# EAGLE board board (EAGLE 9.3.2)
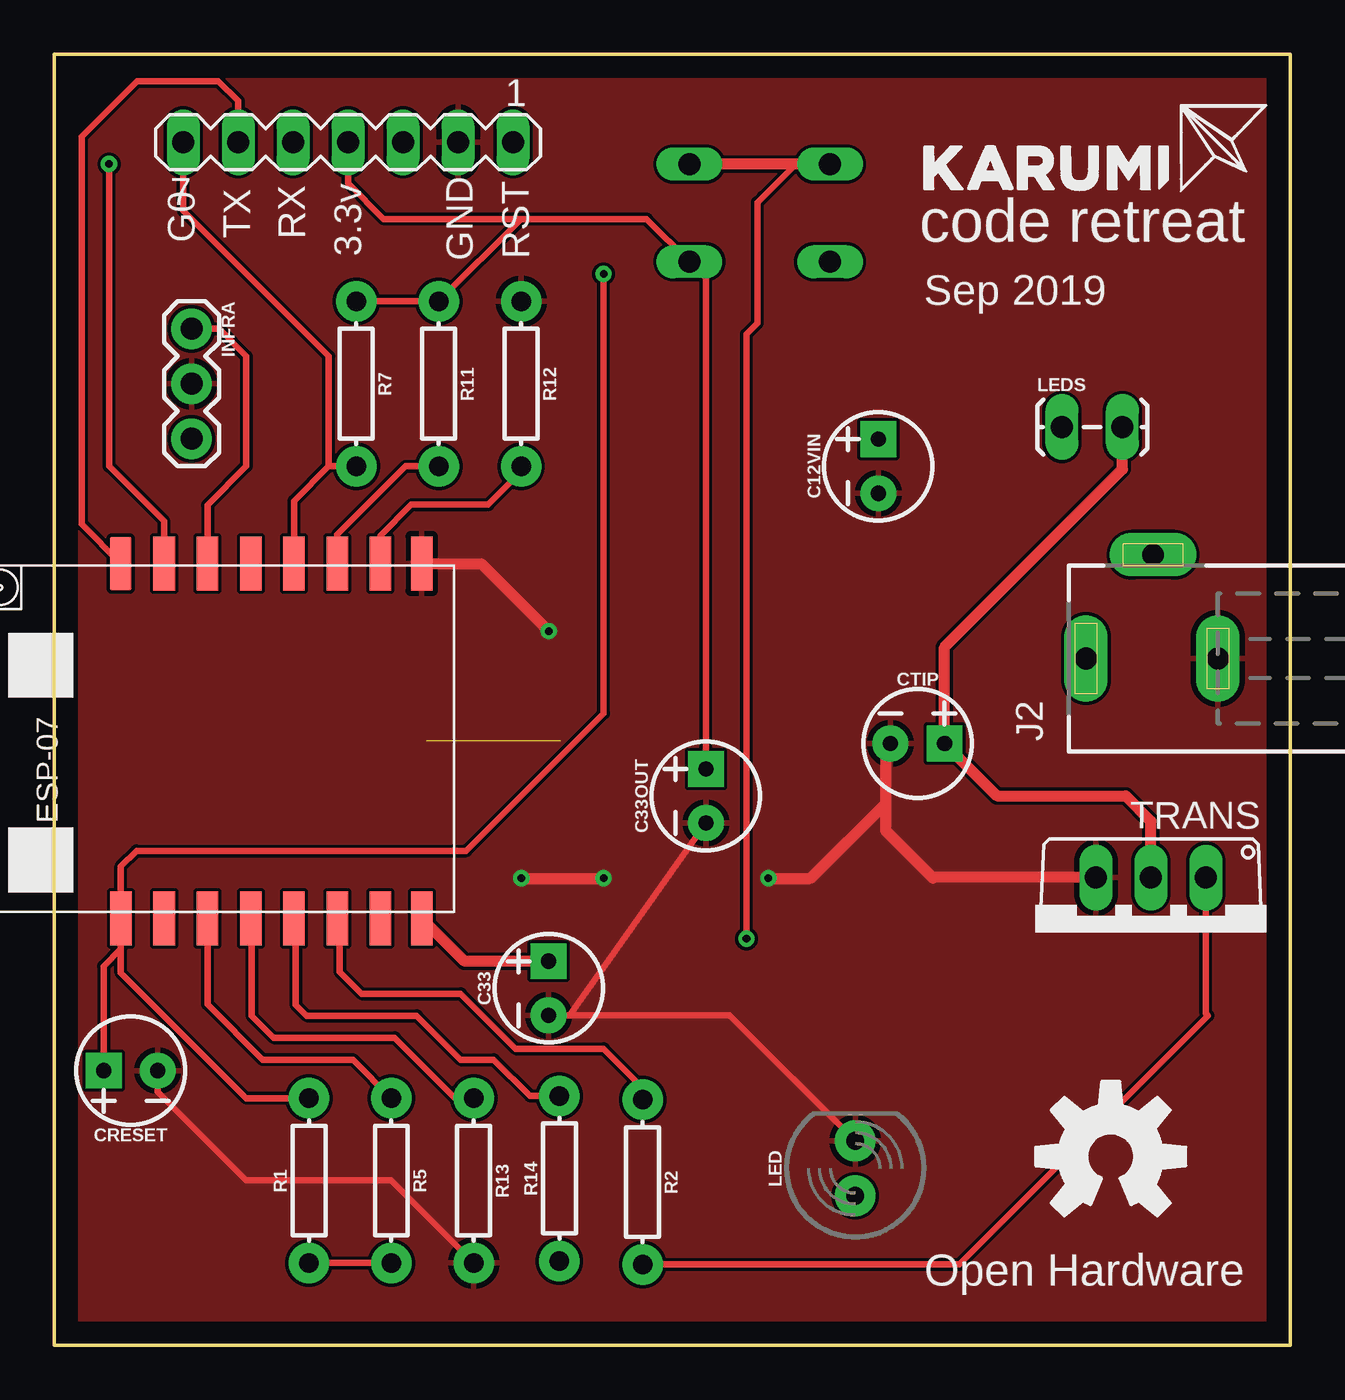
[diagram p0: board, top side]
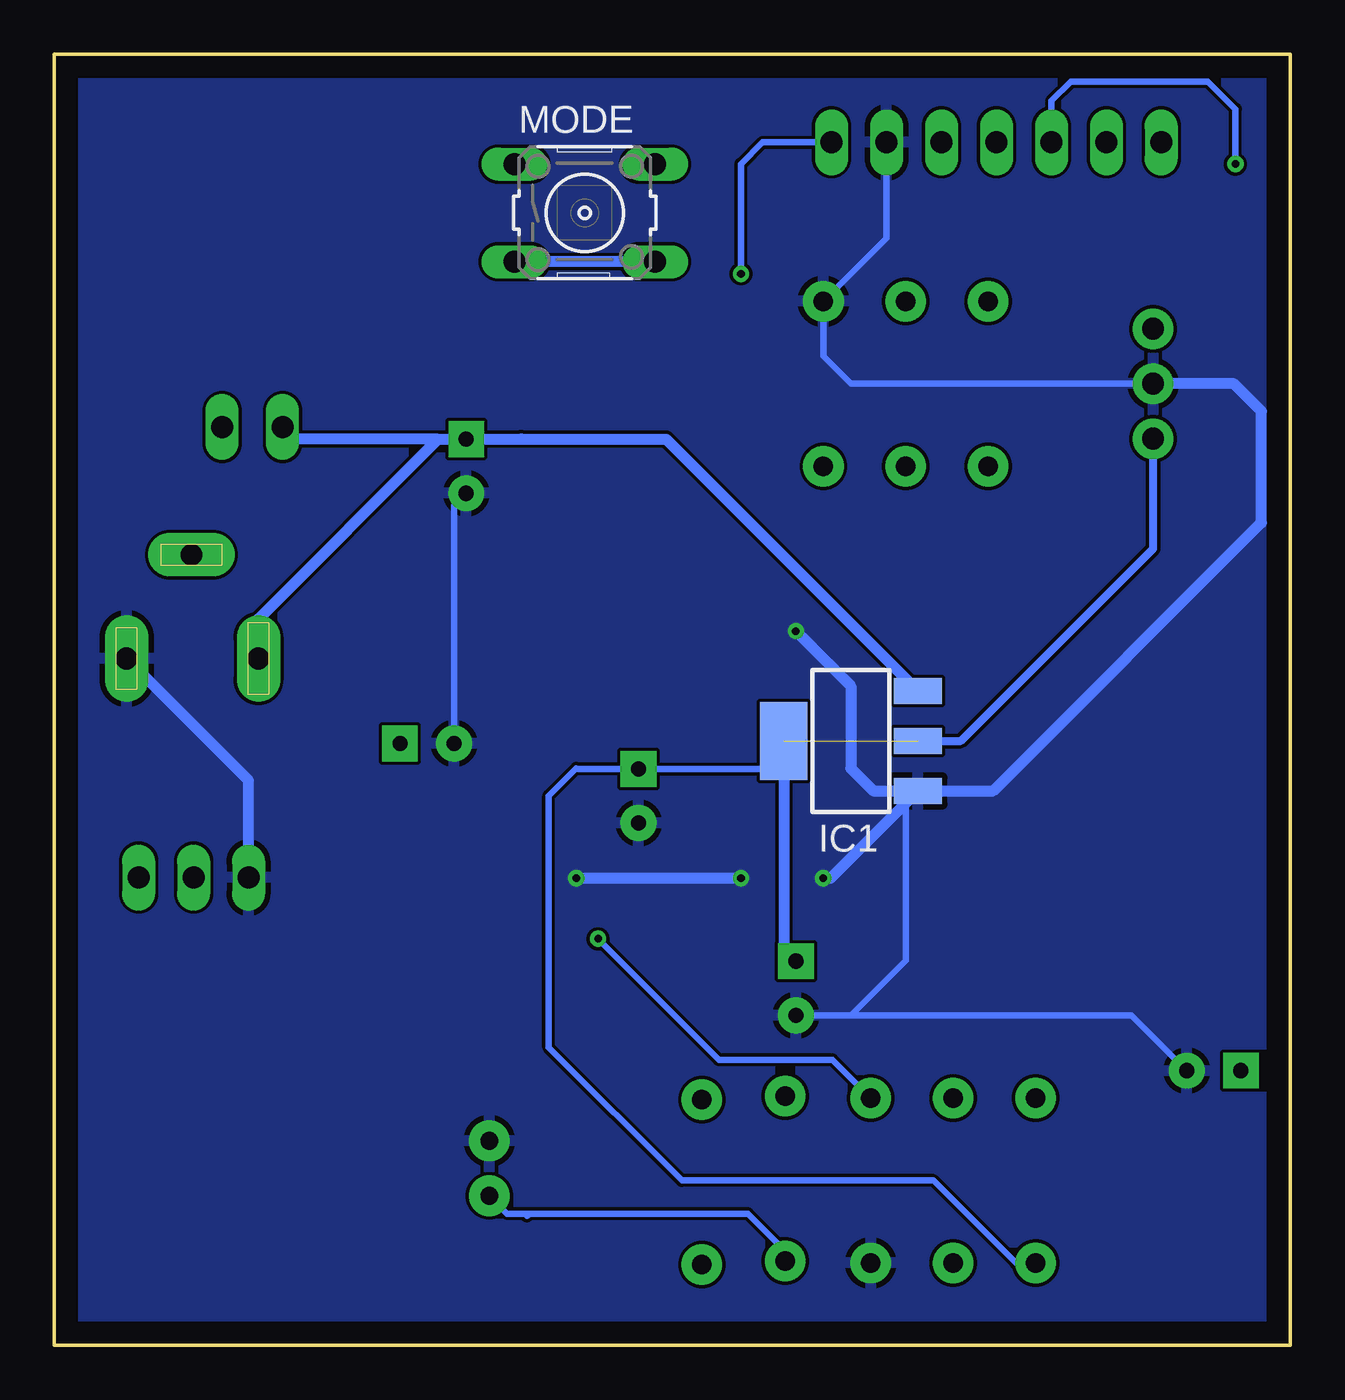
[diagram p1: board, bottom side, seen from below]

Size 57.15 x 59.69 mm. Coordinates in mm from the lower left corner, seen from the top.
Outline: 0,0 0,59.69 57.15,59.69 57.15,0 0,0
Copper layers (1*16): Top 0.035mm / dielectric 1.5mm / Bottom 0.035mm
Design rules "default": minimum track width 6mil, minimum drill 0.35mm, track to track 6mil, track to pad 6mil, pad to pad 6mil, via to via 6mil, smd to smd 6mil, copper to edge 40mil, drill to drill 6mil, minimum pad ring 10mil, minimum via ring 8mil, stop-mask expansion 4mil, vias tented up to drill 0mil, thermal gap 10mil

## Footprints (pad centres in the part's own frame; a part is rotated, then mirrored left to right if it is on the bottom)
CPOL-RADIAL-2.5MM-5MM-KIT = drill 0.7 pad 1.651 square: 1 1.25,0 | drill 0.7 pad 1.651: 2 -1.25,0
SOT223 = smd 1.219 x 2.235: 1 -2.311,-3.099; 2 0,-3.099; 3 2.311,-3.099 | smd 3.6 x 2.2: TAB 0,3.099
1X03 = drill 1.016 pad 1.88: 1 0,0; 2 2.54,0; 3 5.08,0
DCJ0202 = drill 1 pad 2 long: 1 0,3.1; 2 4.8,0; 3 0,-3
LED_5MM-KIT-NO-SILK = drill 0.813 pad 1.88: A -1.27,0; K 1.27,0
1X02_LOCK_LONGPADS = drill 1.016 long: 1 -0.127,0; 2 2.667,0
B3F-10XX = drill 1.016 long: 1 -3.251,2.261; 2 3.251,2.261; 3 -3.251,-2.261; 4 3.251,-2.261
AXIAL-0.3 = drill 0.9 pad 1.88: P$1 -3.81,0; P$2 3.81,0
MA07-1 = drill 1.016 long: 1 -7.62,0; 2 -5.08,0; 3 -2.54,0; 4 0,0; 5 2.54,0; 6 5.08,0; 7 7.62,0
TO220AV = drill 1.016 long: B -2.54,-2.54; C 0,-2.54; E 2.54,-2.54
ESP07-16PIN = smd 2.5 x 1: ADC -8.2,3.8; CH_PD -8.2,1.8; GND 8.2,-8.105; GPIO0 8.2,-2.2; GPIO2 8.2,-4.2; GPIO4 8.2,1.8; GPIO5 8.2,-0.2; GPIO12 -8.2,-4.2; GPIO13 -8.2,-6.2; GPIO14 -8.2,-2.2; GPIO15 8.2,-6.2; GPIO16 -8.2,-0.2; REST -8.2,5.8; RX 8.2,3.8; TX 8.2,5.8; VCC -8.2,-8.105

## Placement (x,y rotation side)
C12VIN  10uF  [CPOL-RADIAL-2.5MM-5MM-KIT]  38.1,40.64 90 top
C33  100uF  [CPOL-RADIAL-2.5MM-5MM-KIT]  22.86,16.51 90 top
C33OUT  10uF  [CPOL-RADIAL-2.5MM-5MM-KIT]  30.13,25.4 90 top
CRESET  100uF  [CPOL-RADIAL-2.5MM-5MM-KIT]  3.54,12.7 180 top
CTIP  10uF  [CPOL-RADIAL-2.5MM-5MM-KIT]  39.91,27.82 0 top
IC1  LM1117IMPX-3.3  [SOT223]  20.32,27.94 90 bottom
INFRA  455-1750-1-ND  [1X03]  6.35,46.99 270 top
J2  DCJ0202  [DCJ0202]  50.8,31.75 90 top
LED  [LED_5MM-KIT-NO-SILK]  37.03,8.19 90 top
LEDS  [1X02_LOCK_LONGPADS]  46.72,42.45 0 top
MODE  [B3F-10XX]  32.62,52.35 0 bottom
R1  10k  [AXIAL-0.3]  11.78,7.62 90 top
R2  470  [AXIAL-0.3]  27.21,7.55 270 top
R5  10k  [AXIAL-0.3]  15.59,7.62 270 top
R7  10k  [AXIAL-0.3]  13.97,44.45 270 top
R11  10k  [AXIAL-0.3]  17.78,44.45 270 top
R12  10k  [AXIAL-0.3]  21.59,44.45 270 top
R13  1K  [AXIAL-0.3]  19.4,7.62 270 top
R14  220  [AXIAL-0.3]  23.36,7.71 90 top
SV1  [MA07-1]  13.59,55.61 180 top
TRANS  TIP41C  [TO220AV]  50.7,19.09 180 top
U$1  ESP07-16PIN  [ESP07-16PIN]  8.89,27.94 90 top
U$2  [OSHW-LOGO-L]  48.84,8.73 0 top

## Library data of the parts
C12VIN C33 C33OUT CRESET CTIP = SparkFun-Capacitors; PROD_ID: CAP-08440
IC1 = lm1117
INFRA = SparkFun-Connectors; PROD_ID: XXX-00000
J2 = con-jack; OC_FARNELL: unknown; OC_NEWARK: unknown
LED = SparkFun-LED
LEDS = SparkFun-Connectors
MODE = switch-omron; MPN: B3F-1000; OC_FARNELL: 176432; OC_NEWARK: 36M3542
R1 R2 R5 R7 R11-R14 = SparkFun-Resistors; PROD_ID: RES-12183
SV1 = con-lstb; OC_FARNELL: unknown; OC_NEWARK: unknown
TRANS = transistor-power
U$1 = esp8266modules; DIMENSIONS: 22.0 x 16.0 mm; PINS: 16; PITCH: 0.078" / 2 mm
U$2 = SparkFun-Aesthetics

## Nets
3.3V: C33.1 C33OUT.1 IC1.2 IC1.TAB INFRA.3 MODE.3 MODE.4 R1.P$1 R5.P$2 R7.P$1 R11.P$1 SV1.4 U$1.VCC
12VIN: C12VIN.1 IC1.3 J2.1 LEDS.1
12VO: CTIP.1 LEDS.2 TRANS.C
ADC: U$1.ADC
CH_PD: R5.P$1 U$1.CH_PD
GND: C12VIN.2 C33.2 C33OUT.2 CRESET.2 CTIP.2 IC1.1 INFRA.2 J2.3 LED.K R12.P$1 R13.P$2 SV1.2 TRANS.E U$1.GND
GPIO0: R7.P$2 SV1.7 U$1.GPIO0
GPIO2: R11.P$2 U$1.GPIO2
GPIO4: INFRA.1 U$1.GPIO4
GPIO5: U$1.GPIO5
GPIO12: R2.P$1 U$1.GPIO12
GPIO13: U$1.GPIO13
GPIO14: R14.P$2 U$1.GPIO14
GPIO15: R12.P$2 U$1.GPIO15
GPIO16: MODE.1 MODE.2 R13.P$1 U$1.GPIO16
N$1: LED.A R14.P$1
N$2: R2.P$2 TRANS.B
N$7: SV1.3
RESET: CRESET.1 R1.P$2 SV1.1 U$1.REST
RX: SV1.5 U$1.RX
TX: SV1.6 U$1.TX

## Tracks (layer width: path | path; a pad name or v marks a point on that pad's centre or on a via)
3.3V  (1 unrouted)
  Top 0.305: R1.P$1 R5.P$2 | C33OUT.1 30.13,49.33 MODE.4 27.39,52.07 21.59,52.07 | 21.59,52.07 R11.P$1 R7.P$1 | 21.59,52.07 15.24,52.07 13.59,53.72 SV1.4
  Top 0.508: C33.1 18.98,17.76 U$1.VCC
  Bottom 0.305: IC1.TAB 23.42,26.67 | 23.42,26.67 23.42,18.32 | C33.1 | 23.42,26.67 23.44,26.65 C33OUT.1 33,26.65 33.02,26.67 34.29,25.4 34.29,13.78 28.13,7.62 16.51,7.62 12.7,3.81 R1.P$1
  Bottom 0.381: IC1.2 15.24,27.94 6.35,36.83 INFRA.3
  Bottom 0.508: IC1.TAB 23.42,18.32 C33.1 | MODE.4 MODE.3
12VIN
  Bottom 0.508: J2.1 47.7,33.58 39.39,41.89 | 39.39,41.89 C12VIN.1 | 35.56,41.91 35.58,41.89 C12VIN.1 | C12VIN.1 28.86,41.89 IC1.3 | 39.39,41.89 46.03,41.89 LEDS.1
12VO
  Top 0.508: TRANS.C 50.7,24.23 49.53,25.4 43.59,25.4 CTIP.1 41.16,32.27 49.39,40.5 LEDS.2
CH_PD
  Top 0.305: R5.P$1 13.81,13.21 9.65,13.21 7.09,15.77 U$1.CH_PD
GND  (via drill 0.35)
  Top 0.305: R13.P$2 15.59,7.62 8.89,7.62 4.79,11.72 CRESET.2 | C33OUT.2 23.82,15.26 C33.2 31.23,15.26 LED.K
  Top 0.508: U$1.GND 19.74,36.14 v22.86,33.02 | v21.59,21.59 v25.4,21.59 | v33.02,21.59 34.97,21.59 38.44,25.06 | CTIP.2 38.44,27.6 38.44,25.06 | TRANS.E 40.68,21.63 40.64,21.59 38.44,23.79 38.44,25.06
  Bottom 0.305: SV1.2 18.67,51.18 R12.P$1 21.59,45.72 20.32,44.45 INFRA.2 8.89,44.45 | CRESET.2 7.35,15.26 20.32,15.26 | C33.2 20.32,15.26 | 20.32,15.26 17.78,17.8 17.78,25.63 | C12VIN.2 38.66,38.83 CTIP.2
  Bottom 0.508: IC1.1 13.74,25.63 1.35,38.02 1.35,43.18 2.62,44.45 INFRA.2 | v22.86,33.02 20.32,30.48 20.32,26.67 19.28,25.63 17.78,25.63 IC1.1 | IC1.1 21.26,21.59 v21.59,21.59 | v25.4,21.59 v33.02,21.59 | TRANS.E 48.16,26.11 J2.3
  pour Bottom: 0,0 0,60 57,60 57,0
  pour Top: 0,0 0,59.69 57.15,59.69 57.15,0
GPIO0
  Top 0.305: U$1.GPIO0 11.09,39.03 12.7,40.64 | R7.P$2 12.7,40.64 | 12.7,40.64 12.7,45.72 5.97,52.45 SV1.7
GPIO2
  Top 0.305: U$1.GPIO2 13.09,37.47 16.26,40.64 R11.P$2
GPIO4
  Top 0.305: INFRA.1 7.62,46.99 8.89,45.72 8.89,40.64 7.09,38.84 U$1.GPIO4
GPIO12
  Top 0.305: U$1.GPIO12 13.21,19.62 13.21,17.27 14.22,16.26 18.8,16.26 21.34,13.72 25.4,13.72 27.21,11.91 R2.P$1
GPIO14
  Top 0.305: U$1.GPIO14 11.18,19.65 11.18,15.75 11.68,15.24 16.76,15.24 18.8,13.21 20.32,13.21 22,11.52 R14.P$2
GPIO15
  Top 0.305: U$1.GPIO15 15.09,37.44 16.51,38.86 20.07,38.86 21.59,40.39 R12.P$2
GPIO16  (via drill 0.35)
  Top 0.305: 9.09,18.85 U$1.GPIO16 9.14,19.69 9.14,15.24 10.16,14.22 15.75,14.22 18.54,11.43 R13.P$1 | v32,18.8 32,46.74 32.51,47.24 32.51,52.83 32.77,53.09 34.29,54.61 MODE.1
  Top 0.508: MODE.1 MODE.2
  Bottom 0.305: R13.P$1 21.18,13.21 26.42,13.21 v32,18.8
N$1
  Bottom 0.305: R14.P$1 23.36,4.36 25.08,6.09 35.18,6.09 | 35.18,6.09 35.29,5.98 | 35.18,6.09 36.2,6.09 LED.A
N$2
  Top 0.305: R2.P$2 41.84,3.74 53.34,15.24 53.24,15.34 TRANS.B
RESET  (via drill 0.35)
  Top 0.305: 3.09,18.33 U$1.REST 3.09,22.14 3.81,22.86 19.05,22.86 25.4,29.21 v25.4,49.53 | CRESET.1 2.29,17.53 3.09,18.33 | R1.P$2 8.89,11.43 3.09,17.23 3.09,18.33
  Bottom 0.305: v25.4,49.53 25.4,54.61 24.4,55.61 SV1.1
RX  (via drill 0.35)
  Top 0.305: U$1.RX 5.08,38.1 2.54,40.64 v2.54,54.61
  Bottom 0.305: v2.54,54.61 2.54,57.15 3.81,58.42 10.16,58.42 11.05,57.53 SV1.5
TX
  Top 0.305: U$1.TX 1.27,37.96 1.27,55.88 3.83,58.45 7.59,58.45 8.51,57.53 SV1.6

## Text on the board
tPlace: G0 | TX | RX | code retreat | 3.3v | GND | RST | Sep 2019 | Open Hardware